# Altium PCB PCB1.PcbDoc
Units mil, origin at the board's own origin, x right, y up, seen from the top; angles counter-clockwise.
Board outline 875 x 480 mil, 2 copper layers (Top Layer, Bottom Layer); 8 components, 7 nets, 24 pads, 0 vias.
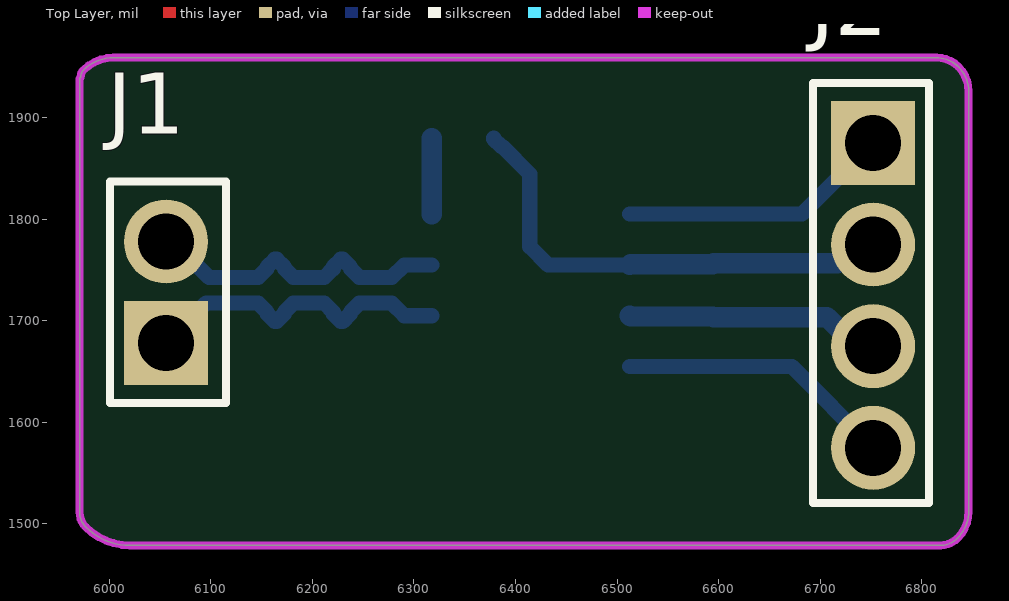
[diagram p0: Top Layer view]
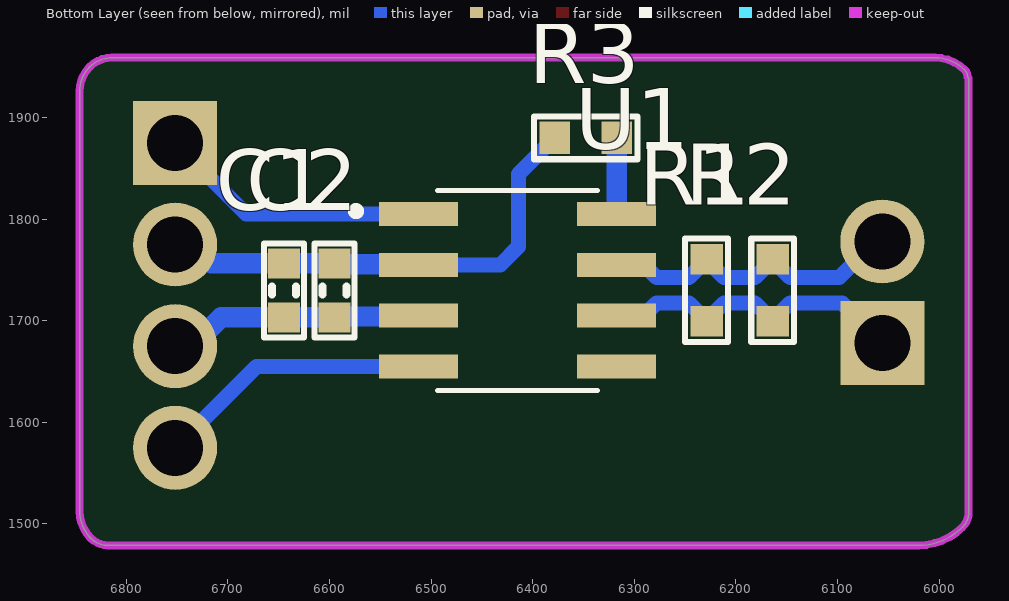
[diagram p1: Bottom Layer view, seen from below]
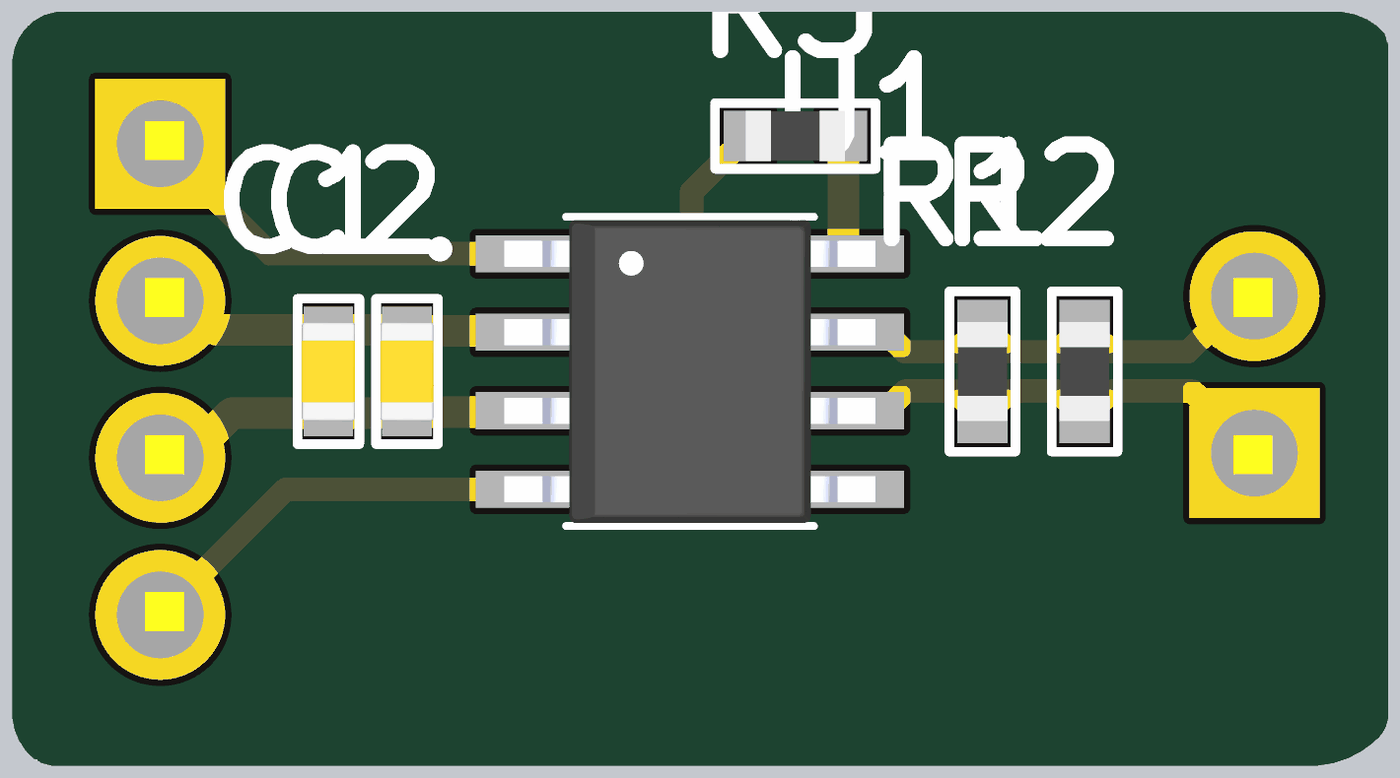
[diagram p2: 3D render of the assembled board from below, using the file's embedded part models]

## Layer stack, top to bottom
Top Solder: solder mask 0.4, Solder Resist, Dk 3.5
Top Layer: signal copper 1.4
Dielectric 1: dielectric 12.6, FR-4, Dk 4.8
Bottom Layer: signal copper 1.4
Bottom Solder: solder mask 0.4, Solder Resist, Dk 3.5

## Board outline
5971,1511.49 5971,1937.59 cw(c5974.41,1937.59) 5972,1940 cw(c5981.66,1940) 5974.83,1946.83 cw(c6004.21,1917.44) 6004.21,1959 6814.27,1959 cw(c6814.27,1928.27) 6836,1950 cw(c6811.86,1925.86) 6846,1925.86 6846,1512.56 cw(c6808.44,1512.56) 6835,1486 cw(c6818.1,1502.9) 6818.1,1479 6020.46,1479 cw(c6020.46,1540.46) 5977,1497 cw(c5991.49,1511.49)

## Design rules (kind name [scope] priority, off if disabled: settings)
Clearance [All] p1: gap=15 ignorepadtopadclearanceinfootprint=FALSE
DiffPairsRouting [All] p1: maxlimit=10 minlimit=10 mostfreqgap=10 toplayer_minwidth=15 toplayer_maxwidth=15 toplayer_prefwidth=15 bottomlayer_minwidth=15 bottomlayer_maxwidth=15 bottomlayer_prefwidth=15 maxuncoupledlength=500
PolygonConnect [All] p1: connectstyle=Relief reliefconductorwidth=10 reliefentries=4 polygonreliefangle="90 Angle" airgapwidth=10
RoutingVias [All] p1: holewidth=28 width=50 viastyle="Through Hole" minholewidth=28 minwidth=50 maxholewidth=28 maxwidth=50
SolderMaskExpansion [All] p1: expansion=4 istentingtop=FALSE
SupplyNets "Schematic Supply Nets_1" [InNet('GND')] p1: voltage=0.000
SupplyNets "Schematic Supply Nets" [InNet('3V3')] p2: voltage=0.000
Width [All] p1: maxlimit=20 minlimit=10 preferedwidth=15
29 further rules are at their usual default settings.

## Classes and differential pairs
component class Sheet1: C1 C2 J1 J2 R1 R3 U1
differential pair CAN: +CAN_P -CAN_N

## Components (designator, comment, footprint, x,y, rotation, side; value= is the part's Value field where it differs from the comment)
C1 "10uF/16V" CAP_0603 6645,1730 r270 bottom
C2 "100nF/50V" CAP_0603 6595,1730 r270 bottom
J1 "2.54mm_2P" Header_2.54mm_2P 6056,1678 r90 top
J2 "2.54mm_4P" Header_2.54mm_4P 6752,1875 r270 top
R1 "120R/1%/1_10W" Resistor_0603 6229,1730 r270 bottom
R2 "120R/1%/1_10W" Resistor_0603 6164,1730 r270 bottom
R3 "10K/1%/1_10W" Resistor_0603 6348,1880 r180 bottom
U1 "SN65HVD230DR" SOIC-8 6415,1730 r180 bottom

## Footprints (in the part's own frame and the unit in brackets; to place one, negate y for a bottom-side part, rotate by r counter-clockwise, add the part's x,y. Pads: shape width x height; smd on the part's side, far side on the other; paste and mask are expansions set on the pad)
CAP_0603 [mm]
  rect 0.75x0.8 smd: 1(-0.675,0) 2(0.675,0)
  silkscreen extent -1.17,-0.5 1.17,0.5, body extent -0.8,-0.43 0.8,0.43, height 0.8
Header_2.54mm_2P [mm] "Vertical PCB Header, pitch 2.54mm, 2p"
  rect 2.1x2.1 hole 1.4: 1(0,0)
  round 2.1 hole 1.4: 2(2.54,0)
  silkscreen extent -1.5,-1.5 4.04,1.4, body extent -1.3,-1.27 3.78,1.22, height 12.01
Header_2.54mm_4P [mm] "Vertical PCB Header, pitch 2.54mm, 4p"
  rect 2.1x2.1 hole 1.4: 1(0,0)
  round 2.1 hole 1.4: 2(2.54,0) 3(5.08,0) 4(7.62,0)
  silkscreen extent -1.5,-1.5 9,1.4, body extent -1.32,-1.32 8.84,1.17, height 10.61
Resistor_0603 [mil]
  rect 30x32 smd: 1(-30.5,0) 2(30.5,0)
  silkscreen extent -51,-21 51,21, body extent -31,-16 31,16, height 28
SOIC-8 [mm]
  rect 1.97x0.6 smd: 1(-2.475,1.905) 2(-2.475,0.635) 3(-2.475,-0.635) 4(-2.475,-1.905) 5(2.475,-1.905) 6(2.475,-0.635) 7(2.475,0.635) 8(2.475,1.905)
  silkscreen extent -4.14,-2.5 2,2.5, body extent -3,-2.45 3,2.45, height 1.7

## Part data
C1: library part Ceramic_Cap_10uF_16V_0603, "CAP, size 0603, 10uF, 16V", Supply Part Number="Tụ Gốm 0603 10uF 16V", Supply Name=Thegioiic, Supply URL=https://www.thegioiic.com/tu-gom-0603-10uf-16v
C2: library part Ceramic_Cap_100nF_50V_0603, "CAP, size 0603, 100nF, 50V", Supply Part Number="Tụ Gốm 0603 100nF (0.1uF) 50V", Supply Name=Thegioiic, Supply URL=https://www.thegioiic.com/tu-gom-0603-100nf-0-1uf-50v
J1: library part Header_2.54mm_2P, "Hàng Rào Đực Đơn 2.54mm 40 Chân 1 Hàng Cao 11.2mm Xuyên Lỗ", Supply Name=Thegioiic, Supply Part Number="Hàng Rào Đực Đơn 2.54mm 40 Chân 1 Hàng Cao 11.2mm Xuyên Lỗ", Supply URL=https://www.thegioiic.com/hang-rao-duc-don-2-54mm-40-chan-1-hang-cao-11-2mm-xuyen-lo
J2: library part Header_2.54mm_4P, "Hàng Rào Đực Đơn 2.54mm 40 Chân 1 Hàng Cao 11.2mm Xuyên Lỗ", Supply Name=Thegioiic, Supply Part Number="Hàng Rào Đực Đơn 2.54mm 40 Chân 1 Hàng Cao 11.2mm Xuyên Lỗ", Supply URL=https://www.thegioiic.com/hang-rao-duc-don-2-54mm-40-chan-1-hang-cao-11-2mm-xuyen-lo
R1 R2: library part Res_120R_0603_1%, "Resistor 0603 120 Ohm 1% 1_10W", Supply Part Number="Điện Trở 120 Ohm 0603 1%", Supply Name=Thegioiic, Supply URL=https://www.thegioiic.com/dien-tro-120-ohm-0603-1-
R3: library part Res_10K_0603_1%, "Resistor 0603 10KOhm 1% 1_10W", Supply Part Number="Điện Trở 10 KOhm 0603 1%", Supply Name=Thegioiic, Supply URL=https://www.thegioiic.com/dien-tro-10-kohm-0603-1-
U1: "1/1 Transceiver Half CANbus", Supply Part Number="SN65HVD230DR CAN Transceiver 8-SOIC", datasheet=https://www.ti.com/lit/ds/symlink/sn65hvd230.pdf, Supply Name=Thegioiic, Supply URL=https://www.thegioiic.com/sn65hvd230dr-can-transceiver-8-soic

## Nets (pads, with @x,y where several pads share a name; then routed paths per layer and width w, separated by ;. In a path a pad name is that pad's centre, name@x,y a point inside that pad or via, vN(x,y) a via of type N, cw(c..) or ccw(c..) an arc to the next point about the centre after c; other vN are vias at no path point)
3V3: C1.2 C2.2 J2.3 U1.3 | length 252
  Bottom Layer w20: U1.3 6513.23,1704.21 6594.21,1704.21 C2.2 C1.2 6706.61,1703.43 6735.04,1675 J2.3
CAN_N: J1.2 R1.1 R2.1 U1.7 | length 313.3
  Bottom Layer w15: J1.2 6062.85,1778 6098.35,1742.5 6146.71,1742.5 6155.5,1751.29 6155.5,1753 6163,1760.5 R2.1 ; R2.1@6165,1760.5 6172.5,1753 6172.5,1751.29 6181.29,1742.5 6211.71,1742.5 6220.5,1751.29 6220.5,1753 6228,1760.5 R1.1 ; R1.1@6230,1760.5 6237.5,1753 6237.5,1751.29 6246.29,1742.5 6278.09,1742.5 6290.59,1755 U1.7
CAN_P: J1.1 R1.2 R2.2 U1.6 | length 314.9
  Bottom Layer w15: J1.1 6095.5,1717.5 6146.71,1717.5 6155.5,1708.71 6155.5,1707 6163,1699.5 R2.2 ; R2.2@6165,1699.5 6172.5,1707 6172.5,1708.71 6181.29,1717.5 6211.71,1717.5 6220.5,1708.71 6220.5,1707 6228,1699.5 R1.2 ; R1.2@6230,1699.5 6237.5,1707 6237.5,1708.71 6246.29,1717.5 6278.09,1717.5 6290.59,1705 U1.6
GND: C1.1 C2.1 J2.2 R3.1 U1.2 | length 476
  Bottom Layer w15: R3.1 6378.5,1879 6386,1871.5 6387,1871.5 6414,1844.5 6414,1773 6432,1755 U1.2
  Bottom Layer w20: U1.2 6513.23,1755.79 6594.21,1755.79 C2.1 C1.1 6716.61,1756.57 6735.04,1775 J2.2
NetR3_2: R3.2 U1.8 | length 75.1
  Bottom Layer w10: R3.2 R3.2@6317.56,1879.94
  Bottom Layer w20: R3.2 6317.5,1805.06 U1.8
RXD: J2.4 U1.4 | length 272.7
  Bottom Layer w15: U1.4 6672,1655 J2.4
TXD: J2.1 U1.1 | length 268.6
  Bottom Layer w15: U1.1 6682,1805 J2.1
pads on no net: U1.5

## Keep-outs
Keep-Out Layer:
  the board outline again, w7.87